# EAGLE board Final_board_R1_2 (EAGLE 7.2.0)
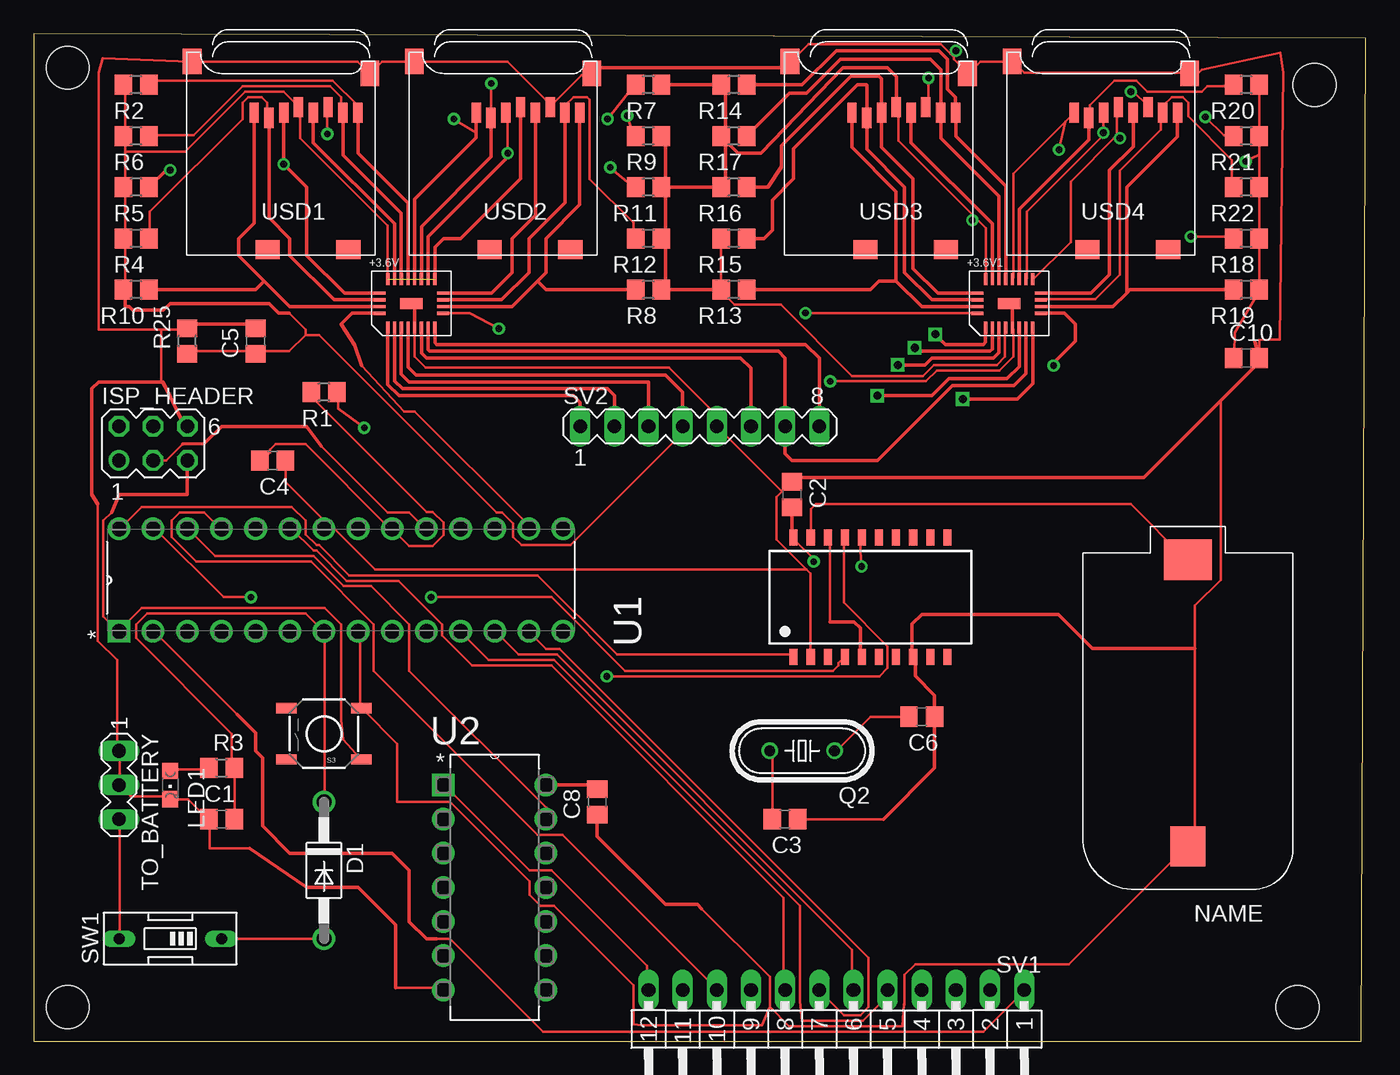
[diagram p0: board, top side]
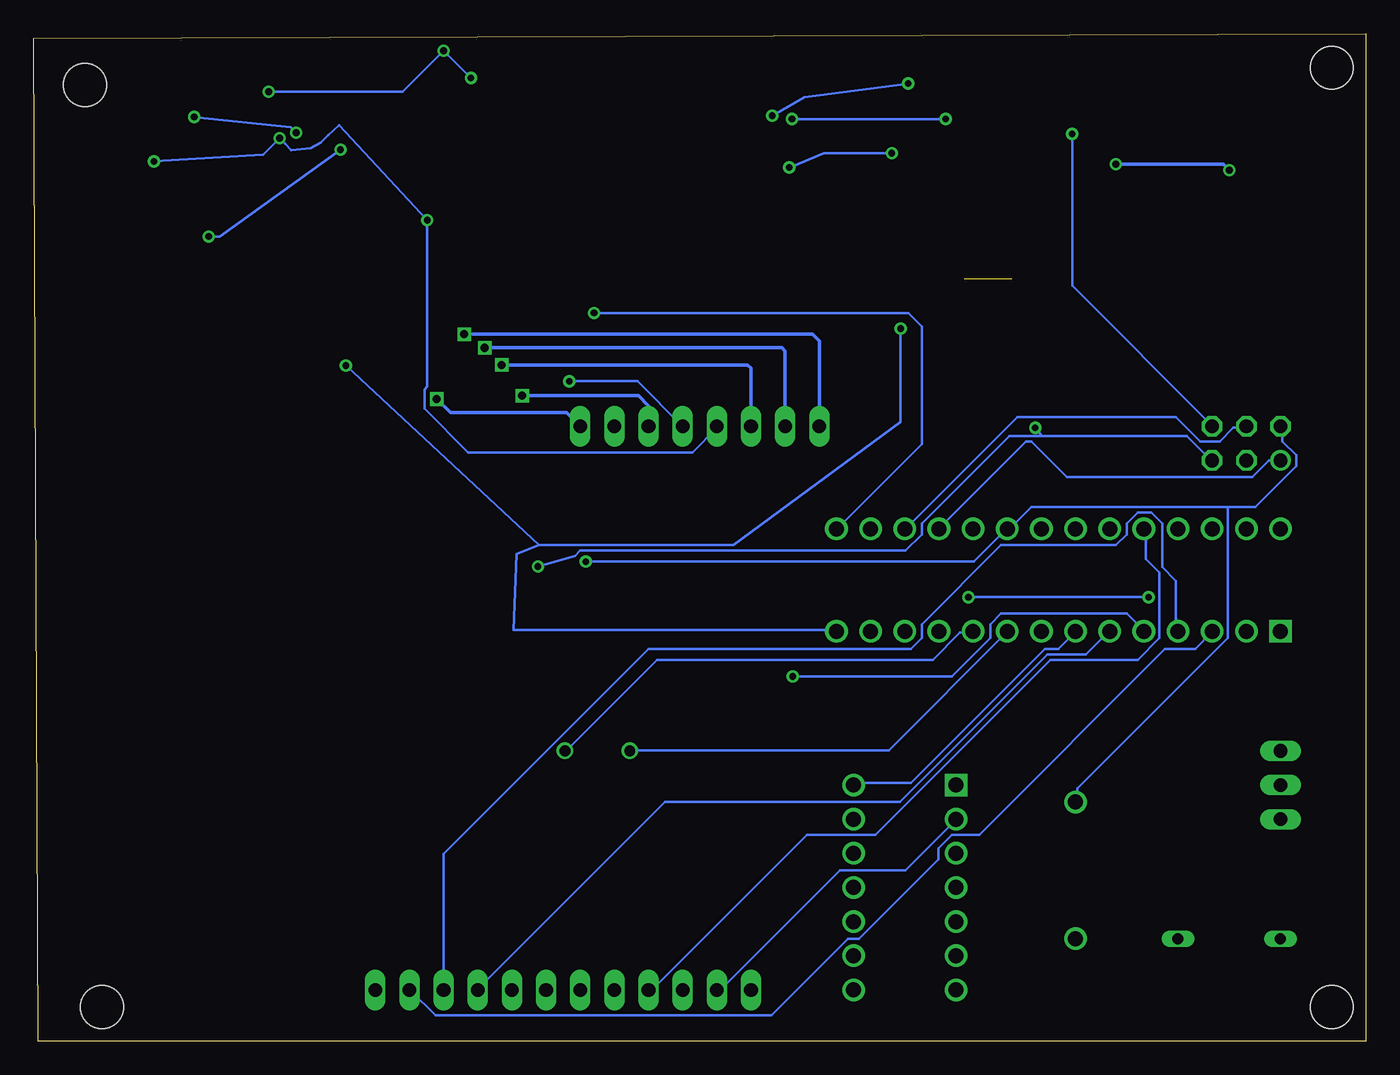
[diagram p1: board, bottom side, seen from below]

Size 99.07 x 74.93 mm. Coordinates in mm from the lower left corner, seen from the top.
Outline: 0,0 98.73,0 99.07,74.6 0.01,74.93 0,0
Copper layers (1*16): Top 0.0178mm / dielectric 59mil / Bottom 0.0178mm
Design rules "epl-lpkf *": minimum track width 8mil, minimum drill 0.5mm, track to track 8mil, track to pad 8mil, pad to pad 8mil, via to via 8mil, smd to smd 8mil, copper to edge 15mil, drill to drill 15mil, minimum pad ring 8mil, minimum via ring 8mil, stop-mask expansion 3mil, vias tented up to drill 0mil, thermal gap 10mil
Holes 3.2 mm at 2.54,72.39 2.54,2.54 93.98,2.54 95.25,71.12

## Footprints (pad centres in the part's own frame; a part is rotated, then mirrored left to right if it is on the bottom)
MLP-24 = smd 0.24 x 0.9: 1CLK -1.1,0.8; 1DAT[0] -0.6,0.8; 1DAT[1] -0.1,0.8; 2CMD 1.4,0.8; 2DAT[2] 0.4,0.8; 2DAT[3] 0.9,0.8; CLK 0.9,-2.8; CMD -0.6,-2.8; DAT[0] 1.4,-2.8; DAT[1] 1.9,-2.8; DAT[2] -1.6,-2.8; DAT[3] -1.1,-2.8; GND0 0.4,-2.8; VDDC1 -1.6,0.8; VDDC2 1.9,0.8; VDDH -0.1,-2.8 | smd 0.9 x 0.24: 1CMD -2.2,-0.25; 1DAT[2] -2.2,-1.25; 1DAT[3] -2.2,-0.75; 2CLCK 2.5,-0.25; 2DAT[0] 2.5,-0.75; 2DAT[1] 2.5,-1.25; /OE -2.2,-1.75; S 2.5,-1.75 | smd 1.676 x 0.813: GND1 0.138,-1.02
C0805 = smd 1.3 x 1.5: 1 -0.95,0; 2 0.95,0
DO41-10 = drill 1.118: A 5.08,0; C -5.08,0
MA03-2 = drill 1.016: 1 -2.54,-1.27 | drill 1.016 octagon: 2 -2.54,1.27; 3 0,-1.27; 4 0,1.27; 5 2.54,-1.27; 6 2.54,1.27
CHIPLED_0805 = smd 1.2 x 1.2: A 0,-1.05; C 0,1.05
HC49/S = drill 0.813: 1 -2.413,0; 2 2.413,0
R0805 = smd 1.3 x 1.5: 1 -0.95,0; 2 0.95,0
TACTILE-SWITCH-SMD = smd 1.524 x 0.762: 1 -2.794,1.905; 2 2.794,1.905; 3 -2.794,-1.905; 4 2.794,-1.905
MA12-1W = drill 1.016 long: 1 -13.97,0; 2 -11.43,0; 3 -8.89,0; 4 -6.35,0; 5 -3.81,0; 6 -1.27,0; 7 1.27,0; 8 3.81,0; 9 6.35,0; 10 8.89,0; 11 11.43,0; 12 13.97,0
MA08-1 = drill 1.016 long: 1 -8.89,0; 2 -6.35,0; 3 -3.81,0; 4 -1.27,0; 5 1.27,0; 6 3.81,0; 7 6.35,0; 8 8.89,0
EDG-01 = drill 0.813 long: 1 0,-3.81; 2 0,3.81
MA03-1 = drill 1.016 long: 1 -2.54,0; 2 0,0; 3 2.54,0
DIP254P762X457-28 = drill 1.118 square: 1 -7.62,33.02 | drill 1.118: 2 -7.62,30.48; 3 -7.62,27.94; 4 -7.62,25.4; 5 -7.62,22.86; 6 -7.62,20.32; 7 -7.62,17.78; 8 -7.62,15.24; 9 -7.62,12.7; 10 -7.62,10.16; 11 -7.62,7.62; 12 -7.62,5.08; 13 -7.62,2.54; 14 -7.62,0; 15 0,0; 16 0,2.54; 17 0,5.08; 18 0,7.62; 19 0,10.16; 20 0,12.7; 21 0,15.24; 22 0,17.78; 23 0,20.32; 24 0,22.86; 25 0,25.4; 26 0,27.94; 27 0,30.48; 28 0,33.02
DIP254P762X508-14 = drill 1.118 square: 1 -7.62,15.24 | drill 1.118: 2 -7.62,12.7; 3 -7.62,10.16; 4 -7.62,7.62; 5 -7.62,5.08; 6 -7.62,2.54; 7 -7.62,0; 8 0,0; 9 0,2.54; 10 0,5.08; 11 0,7.62; 12 0,10.16; 13 0,12.7; 14 0,15.24
N5 = smd 0.6 x 1.2: !INT -0.635,4.445; !PFO 3.175,4.445; !RST 0.635,4.445; !TS 1.905,-4.445; BBS -1.905,4.445; CLKOUT 3.175,-4.445; IFS 0.635,-4.445; N.C.1 5.715,-4.445; N.C.2 6.985,-4.445; N.C.3 5.715,4.445; N.C.4 6.985,4.445; PFI 1.905,4.445; SCL -4.445,-4.445; SDA/!CE -0.635,-4.445; SDI -3.175,-4.445; SDO -1.905,-4.445; TEST 4.445,4.445; VBAT -3.175,4.445; VDD -4.445,4.445; VSS 4.445,-4.445
S8421R = smd 2.6 x 3: GND 1.8,19.8 | smd 3.6 x 3: VBAT 1.8,-1.5
MICROSD = smd 0.7 x 1.5: 1 9,-10.64; 2 7.9,-10.24; 3 6.8,-10.64; 4 5.7,-11.04; 5 4.6,-10.64; 6 3.5,-11.04; 7 2.4,-10.64; 8 1.3,-10.64 | smd 1.8 x 1.4: CD1 2,-0.44; CD2 8,-0.44 | smd 1.4 x 1.9: MT1 0.4,-13.54; MT2 13.6,-14.44

## Placement (x,y rotation side)
+3.6V  [MLP-24]  27.94,55.88 0 top
+3.6V1  [MLP-24]  72.39,55.88 0 top
C1  10u  [C0805]  13.97,16.51 0 top
C2  10u  [C0805]  56.39,40.64 270 top
C3  22p  [C0805]  55.88,16.51 180 top
C4  10u  [C0805]  17.78,43.18 180 top
C5  200nF  [C0805]  16.51,52.07 90 top
C6  22p  [C0805]  66.04,24.13 180 top
C8  100n  [C0805]  41.91,17.78 90 top
C10  200nF  [C0805]  90.17,50.8 0 top
D1  1N4004  [DO41-10]  21.59,12.7 270 top
ISP_HEADER  [MA03-2]  8.89,44.45 0 top
LED1  [CHIPLED_0805]  10.16,19.05 180 top
Q2  16MHz  [HC49/S]  57.15,21.59 180 top
R1  10k  [R0805]  21.59,48.26 180 top
R2  47k  [R0805]  7.62,71.12 180 top
R3  10k  [R0805]  13.97,20.32 0 top
R4  47k  [R0805]  7.62,59.69 180 top
R5  47k  [R0805]  7.62,63.5 180 top
R6  47k  [R0805]  7.62,67.31 180 top
R7  47k  [R0805]  45.72,71.12 180 top
R8  47k  [R0805]  45.72,55.88 180 top
R9  47k  [R0805]  45.72,67.31 180 top
R10  47k  [R0805]  7.62,55.88 180 top
R11  47k  [R0805]  45.72,63.5 180 top
R12  47k  [R0805]  45.72,59.69 180 top
R13  47k  [R0805]  52.07,55.88 180 top
R14  47k  [R0805]  52.07,71.12 180 top
R15  47k  [R0805]  52.07,59.69 180 top
R16  47k  [R0805]  52.07,63.5 180 top
R17  47k  [R0805]  52.07,67.31 180 top
R18  47k  [R0805]  90.17,59.69 180 top
R19  47k  [R0805]  90.17,55.88 180 top
R20  47k  [R0805]  90.17,71.12 180 top
R21  47k  [R0805]  90.17,67.31 180 top
R22  47k  [R0805]  90.17,63.5 180 top
R25  750k  [R0805]  11.43,52.07 90 top
S3  TAC_SWITCHSMD  [TACTILE-SWITCH-SMD]  21.59,22.86 180 top
SV1  [MA12-1W]  59.69,3.81 180 top
SV2  [MA08-1]  49.53,45.72 0 top
SW1  [EDG-01]  10.16,7.62 90 top
TO_BATTERY  [MA03-1]  6.35,19.05 270 top
U1  ATMEGA328P-PU  [DIP254P762X457-28]  39.37,38.1 90 top
U2  CD4066BE  [DIP254P762X508-14]  38.1,3.81 0 top
U$1  RTC  [N5]  60.96,33.02 0 top
U$2  CR2032  [S8421R]  87.63,34.29 180 top
USD1  MICROSD  [MICROSD]  25.4,58.42 180 top
USD2  MICROSD  [MICROSD]  41.91,58.42 180 top
USD3  MICROSD  [MICROSD]  69.85,58.42 180 top
USD4  MICROSD  [MICROSD]  86.36,58.42 180 top

## Library data of the parts
+3.6V +3.6V1 = FSSD06_MLP24a
C1-C6 C8 C10 R1-R22 R25 = rcl
D1 = diode
ISP_HEADER SV1 SV2 TO_BATTERY = con-lstb; OC_FARNELL: unknown; OC_NEWARK: unknown
LED1 = led
Q2 = crystal; OC_FARNELL: 1667008; OC_NEWARK: unknown
S3 = SparkFun-Electromechanical; PROD_ID: SWCH-08247
SW1 = special
U1 = Atmel_By_element14_Batch_1-00; MPN: ATMEGA328P-PU; OC_FARNELL: 1715487; OC_NEWARK: 15R0268; PACKAGE: PDIP-28; SUPPLIER: Atmel
U2 = Texas Instruments_By_element14_Batch_1; MPN: CD4066BE; OC_FARNELL: 1106112; OC_NEWARK: 60K5124; PACKAGE: PDIP-14; SUPPLIER: Texas Instruments
U$1 = soic20
U$2 = CR2032
USD1-USD4 = adafruit

## Nets
/OE1: +3.6V1./OE U1.15
/OE2: +3.6V./OE U1.16
CLK: +3.6V1.CLK +3.6V.CLK SV2.6
CMD: +3.6V1.CMD +3.6V.CMD SV2.3
DAT[0]: +3.6V1.DAT[0] +3.6V.DAT[0] SV2.7
DAT[1]: +3.6V1.DAT[1] +3.6V.DAT[1] SV2.8
DAT[2]: +3.6V1.DAT[2] +3.6V.DAT[2] SV2.1
DAT[3]: +3.6V1.DAT[3] +3.6V.DAT[3] SV2.2
GND: +3.6V1.GND0 +3.6V1.GND1 +3.6V.GND0 +3.6V.GND1 C1.1 C2.1 C3.1 C4.1 C5.2 C6.1 C8.1 C10.2 ISP_HEADER.6 LED1.C R25.2 S3.3 SV2.5 TO_BATTERY.1 TO_BATTERY.2 U1.8 U1.22 U2.7 U$1.SDI U$1.VSS U$2.GND USD1.6 USD1.MT1 USD1.MT2 USD2.6 USD2.MT1 USD2.MT2 USD3.6 USD3.MT1 USD3.MT2 USD4.6 USD4.MT1 USD4.MT2
N$1: +3.6V.1DAT[0] R6.1 USD1.7
N$2: LED1.A R3.1
N$3: D1.A SW1.1
N$4: U1.27 U$1.SDA/!CE
N$5: ISP_HEADER.5 R1.1 S3.1 U1.1 U$1.!RST
N$6: SV1.1 U1.2
N$7: SV1.2 U1.3
N$8: C3.2 Q2.2 U1.9
N$10: C6.2 Q2.1 U1.10
N$11: ISP_HEADER.3 U1.19
N$12: SV1.3 U1.4
N$13: SV1.4 U1.6
N$14: U1.28 U$1.SCL
N$15: U$1.VBAT U$2.VBAT
N$16: SV1.5 U1.11
N$17: SV1.6 U1.12
N$18: SV1.7 U1.13
N$19: SV1.8 U1.23
N$20: SW1.2 TO_BATTERY.3
N$21: U$1.BBS U$1.IFS
N$22: SV1.9 U1.24
N$23: SV1.10 U1.25
N$24: U1.26 U2.13
N$25: U1.5 U$1.!INT
N$26: SV1.11 U2.2
N$27: SV1.12 U2.1
N$28: +3.6V.1DAT[1] R2.1 USD1.8
N$29: +3.6V.1DAT[2] R10.1 USD1.1
N$30: +3.6V.1CMD R5.1 USD1.3
N$31: +3.6V.1CLK USD1.5
N$32: +3.6V.2DAT[3] R9.2 USD2.2
N$33: +3.6V.2DAT[0] R12.2 USD2.7
N$34: +3.6V.2DAT[1] R8.2 USD2.8
N$35: +3.6V.2DAT[2] R7.2 USD2.1
N$36: +3.6V.2CMD R11.2 USD2.3
N$37: +3.6V.2CLCK USD2.5
N$38: +3.6V.1DAT[3] R4.1 USD1.2
N$39: +3.6V1.1DAT[0] R17.1 USD3.7
N$40: +3.6V1.1DAT[1] R14.1 USD3.8
N$41: +3.6V1.1DAT[2] R13.1 USD3.1
N$42: +3.6V1.1CMD R16.1 USD3.3
N$43: +3.6V1.1CLK USD3.5
N$44: +3.6V1.2DAT[3] R20.2 USD4.2
N$45: +3.6V1.2DAT[0] R22.2 USD4.7
N$46: +3.6V1.2DAT[1] R19.2 USD4.8
N$47: +3.6V1.2DAT[2] R18.2 USD4.1
N$48: +3.6V1.2CMD R21.2 USD4.3
N$49: +3.6V1.2CLCK USD4.5
N$50: +3.6V1.1DAT[3] R15.1 USD3.2
N$60: ISP_HEADER.1 U1.18
N$61: ISP_HEADER.4 U1.17
S: +3.6V1.S +3.6V.S U1.14
VCC: C1.2 C2.2 C4.2 C8.2 D1.C ISP_HEADER.2 R1.2 R3.2 U1.7 U1.20 U2.14 U$1.VDD
VDDH: +3.6V1.VDDC1 +3.6V1.VDDC2 +3.6V1.VDDH +3.6V.VDDC1 +3.6V.VDDC2 +3.6V.VDDH C5.1 C10.1 R2.2 R4.2 R5.2 R6.2 R7.1 R8.1 R9.1 R10.2 R11.1 R12.1 R13.2 R14.2 R15.2 R16.2 R17.2 R18.1 R19.1 R20.1 R21.1 R22.1 R25.1 SV2.4 USD1.4 USD2.4 USD3.4 USD4.4

## Tracks (layer width: path | path; a pad name or v marks a point on that pad's centre or on a via)
/OE1  (via drill 0.5)
  Top 0.203: v57.4,54.15 70,54.15 +3.6V1./OE
  Bottom 0.203: v57.4,54.15 34.04,54.15 33.02,53.14 33.02,44.4 39.32,38.1 U1.15
/OE2
  Top 0.203: 24.38,50.24 27.53,46.84 28.35,46.84 36.68,38.51 36.68,38.1 U1.16 | 25.91,54.15 +3.6V./OE
  Top 0.254: 25.91,54.15 23.67,54.15 22.86,53.34 23.88,51.77 24.38,50.24
CLK  (via drill 0.6 pad 0.25)
  Top 0.254: +3.6V.CLK 28.84,51.17 29.21,50.8 52.58,50.8 53.34,50.04 SV2.6 | +3.6V1.CLK 73.29,50.18 72.39,49.28 68.07,49.28 66.8,48.01 v62.74,48.01
  Bottom 0.254: v62.74,48.01 54.1,48.01 53.34,47.24 SV2.6
CMD  (via drill 0.6 pad 0.25)
  Top 0.254: +3.6V.CMD 27.34,49.62 27.94,49.02 45.72,49.02 SV2.3 | +3.6V1.CMD 71.79,51.22 71.37,50.8 66.8,50.8 66.29,50.29 v64.26,50.29
  Bottom 0.254: v64.26,50.29 45.97,50.29 45.72,50.04 SV2.3
DAT[0]
  Top 0.254: +3.6V.DAT[0] 29.34,51.43 29.46,51.31 55.37,51.31 55.88,50.8 SV2.7 55.88,43.69 56.39,43.18 62.74,43.18 68.33,48.77 72.9,48.77 73.79,49.66 +3.6V1.DAT[0]
DAT[1]  (via drill 0.6 pad 0.25)
  Top 0.254: +3.6V.DAT[1] 29.84,51.95 29.97,51.82 57.4,51.82 58.42,50.8 SV2.8 | +3.6V1.DAT[1] 74.29,48.89 73.15,47.75 v69.09,47.75
  Bottom 0.254: v69.09,47.75 68.07,46.74 59.44,46.74 SV2.8
DAT[2]  (via drill 0.6 pad 0.25)
  Top 0.254: +3.6V.DAT[2] 26.34,48.84 27.18,48.01 40.13,48.01 40.64,47.5 SV2.1 | +3.6V1.DAT[2] 70.79,51.99 70.61,51.82 67.82,51.82 v67.06,52.58
  Bottom 0.254: v67.06,52.58 41.15,52.58 40.64,52.07 SV2.1
DAT[3]  (via drill 0.6 pad 0.25)
  Top 0.254: +3.6V.DAT[3] 26.84,49.11 27.43,48.51 42.67,48.51 43.18,48.01 SV2.2 | +3.6V1.DAT[3] 71.29,51.48 71.12,51.31 65.79,51.31 v65.53,51.56
  Bottom 0.254: v65.53,51.56 43.43,51.56 43.18,51.31 SV2.2
GND  (via drill 0.5)
  Top 0.203: 26.92,3.96 30.38,3.96 U2.7 | 16.05,14.33 13.11,14.33 13.11,16.36 C1.1 12.9,16.56 11.48,17.98 10.26,17.98 LED1.C 10.06,18.19 7.21,18.19 TO_BATTERY.2 6.4,19.2 6.4,21.44 TO_BATTERY.1 6.2,21.64 6.2,28.35 4.78,29.77 4.78,39.93 | USD2.MT1 41.35,71.83 40.74,71.83 38.51,69.6 USD2.6 38.3,69.6 38.3,69.8 35.26,72.85 28.35,72.85 USD2.MT2 28.14,72.85 25.91,72.85 25.09,72.03 USD1.MT1 24.89,72.03 24.08,72.85 11.89,72.85 USD1.MT2 11.68,72.85 5.13,73.1 4.83,72.03 4.83,52.93 9.5,52.93 | 11.48,45.82 ISP_HEADER.6 | 9.5,52.93 11.28,52.93 R25.2 | 9.5,52.93 9.5,49.12 11.28,45.82 ISP_HEADER.6 | 11.28,45.62 ISP_HEADER.6 | 65.53,28.55 U$1.VSS | U1.8 24.28,30.38 24.28,24.89 S3.3 24.49,24.69 27.03,22.1 27.03,17.78 30.99,17.78 36.88,11.89 36.88,10.87 37.69,10.06 38.71,10.06 44.6,4.17 44.6,1.27 45.21,1.17 54.15,1.17 54.76,2.54 | 49.68,9.86 54.76,4.77 54.76,2.54 | 54.76,2.54 56.19,1.12 64.62,1.12 64.72,2.74 64.77,2.7 64.77,4.92 65.56,5.72 76.99,5.72 85.73,14.45 U$2.GND 86.36,14.61 86.36,29.21 86.36,32.39 88.27,34.29 88.27,47.62 | 90.93,51.92 C10.2 91.14,52.12 91.9,52.17 92.66,52.17 92.91,72.03 92.71,73.51 86.87,72.24 86.46,71.83 USD4.MT1 85.85,72.03 73.66,72.03 72.85,72.85 USD4.MT2 72.64,72.85 70.41,72.85 69.6,72.03 USD3.MT1 69.37,72.07 68.42,73.02 68.42,73.18 68.16,73.44 | +3.6V.GND0 28.35,52.93 28.35,50.9 29.16,50.09 47.24,50.09 50.7,46.63 50.7,45.82 SV2.5 55.64,40.88 | 65.33,28.75 U$1.VSS | 21.59,38.73 18.73,41.59 C4.1 | U$1.SDI 57.78,34.77 57.47,35.08 | 57.47,35.08 55.24,37.31 55.24,40.48 55.64,40.88 | 55.64,40.88 56.36,41.59 C2.1 | U1.22 22.38,38.1 25.4,35.08 57.47,35.08
  Top 0.203: 68.16,73.44 67.47,74.14 57.63,74.14 56.36,72.87 USD3.MT2 | 65.56,28.57 U$1.VSS | 63.18,16.51 C3.1 | C6.1 | v59.23,49.07 66.34,49.07 67.16,49.89 71.83,49.89 72.85,50.9 72.85,52.93 +3.6V1.GND0 | v66.55,71.63 66.55,69.6 USD3.6 | v68.58,73.66 68.38,73.66 68.16,73.44 | v81.59,70.61 81.79,70.61 82.8,69.6 USD4.6 | v21.84,67.46 21.84,69.39 USD1.6
  Top 0.254: +3.6V.GND0 28.34,54.6 +3.6V.GND1 | +3.6V1.GND0 72.79,54.6 +3.6V1.GND1 | 90.81,52.07 C10.2 91.12,50.48 88.27,47.62 82.55,41.91 56.71,41.91 C2.1 | 86.36,71.75 USD4.MT1 | USD3.MT2 55.88,72.39 41.91,72.39 USD2.MT1 | R25.2 11.43,53.34 16.51,53.34 C5.2 16.51,52.71 | U1.22 21.59,38.73 | C8.1 41.91,15.24 46.99,10.16 49.38,10.16 49.68,9.86 | 65.56,28.57 65.56,27.15 66.99,25.72 C6.1 66.99,20.32 63.18,16.51 | 65.33,28.75 65.33,31.04 66.04,31.75 76.2,31.75 78.74,29.21 86.36,29.21 | 11.28,45.62 9.65,49.02 4.83,49.02 4.32,48.51 4.32,40.64 4.78,39.93 | 16.05,14.33 20.32,11.43 24.13,11.43 26.92,8.64 26.92,3.96
  Bottom 0.203: v59.23,49.07 54.15,49.07 SV2.5 | v66.55,71.63 v68.58,73.66 71.63,70.61 v81.59,70.61 | v21.84,67.46 21.84,56.19 11.48,45.82 ISP_HEADER.6
N$1
  Top 0.203: R6.1 8.64,67.36 11.89,67.36 15.55,71.02 22.05,71.02 22.86,70.21 22.86,69.19 USD1.7
  Top 0.254: USD1.7 23,65.9 27.34,61.56 +3.6V.1DAT[0]
N$2
  Top 0.203: LED1.A 10.26,20.22 12.9,20.22 R3.1
N$3
  Top 0.203: D1.A SW1.1
N$4  (via drill 0.5)
  Top 0.203: v29.57,33.02 38.51,33.02 43.99,27.53 59.44,27.53 59.84,27.94 59.84,28.14 60.25,28.55 U$1.SDA/!CE | v16.15,33.02 14.12,33.02 9.04,38.1 U1.27
  Bottom 0.203: v16.15,33.02 v29.57,33.02
N$5  (via drill 0.5)
  Top 0.203: 5.79,39.32 5.18,38.71 5.18,31.6 6.2,30.58 U1.1 6.4,30.58 8.03,32.21 21.64,32.21 22.86,30.99 22.86,23.88 23.01,22.45 24.28,21.03 S3.1 | v61.57,35.31 61.47,36.47 61.47,37.29 U$1.!RST | v24.59,45.62 22.66,47.04 22.66,48.26 R1.1
  Top 0.254: ISP_HEADER.5 11.43,40.64 6.35,40.64 5.79,39.32
  Bottom 0.203: v61.57,35.31 58.83,36.07 58.42,36.47 34.24,36.47 33.02,37.69 33.02,38.51 26.52,45.01 24.08,45.01 | 24.08,45.01 13.31,45.01 11.48,43.18 ISP_HEADER.5 | 24.08,45.01 v24.59,45.62
N$6
  Top 0.203: 29.97,7.62 30.99,7.62 37.9,0.71 70.61,0.71 73.66,3.76 SV1.1 | 15.14,24.28 9.04,30.38 U1.2
  Top 0.254: 15.14,24.28 16.51,22.91 16.51,21.59 17.02,21.08 17.02,16 19.05,13.97 26.67,13.97 27.94,12.7 27.94,8.89 29.21,7.62 29.97,7.62
N$7
  Bottom 0.203: SV1.2 71.02,3.76 69.19,1.93 44.2,1.93 38.51,7.62 37.69,7.62 31.8,13.51 31.8,14.33 30.79,15.34 28.75,15.34 14.93,29.16 12.7,29.16 11.48,30.38 U1.3
N$8
  Top 0.203: C3.2 54.93,21.43 54.77,21.59 Q2.2
  Bottom 0.203: U1.9 26.72,30.38 35.46,21.64 54.56,21.64 Q2.2
N$10
  Top 0.203: 59.64,21.64 Q2.1 59.69,21.59 62.23,24.13 C6.2
  Bottom 0.203: U1.10 29.36,30.38 30.18,30.38 32.21,28.35 52.73,28.35 59.44,21.64 Q2.1
N$11
  Top 0.203: ISP_HEADER.3 9.86,43.18 11.07,44.4 | 21.23,44.4 21.39,44.25 26.31,39.32 27.94,39.32 29.16,38.1 U1.19
  Top 0.254: 11.07,44.4 12.7,44.45 13.97,45.72 20.32,45.72 21.39,44.25
N$12
  Bottom 0.203: SV1.3 68.58,13.92 53.34,29.16 33.83,29.16 33.02,29.97 33.02,30.99 27.13,36.88 18.59,36.88 17.78,37.69 17.78,38.51 16.97,39.32 15.95,39.32 15.14,38.51 15.14,35.26 14.12,34.24 14.12,30.58 U1.4
N$13
  Bottom 0.203: SV1.4 65.94,3.96 52.12,17.78 34.65,17.78 23.67,28.75 20.83,28.75 19.2,30.38 U1.6
N$14
  Top 0.203: U$1.SCL 56.39,28.75 43.38,28.75 37.49,34.65 23.47,34.65 21.23,36.88 21.03,36.88 20.22,37.69 20.22,38.71 19.2,39.73 8.03,39.73 6.4,38.1 U1.28
N$15
  Top 0.203: U$1.VBAT 57.81,37.49 57.81,39.57 58.17,39.93 81.59,39.93 85.65,35.87 U$2.VBAT
N$16
  Top 0.203: SV1.5 63.5,3.35 61.67,1.52 57.15,1.52 57,2.95 57,10.06 38.71,28.35 33.83,28.35 31.8,30.38 U1.11
N$17
  Top 0.203: SV1.6 60.86,3.96 60.86,6.81 38.91,28.75 36.07,28.75 34.44,30.38 U1.12
N$18
  Top 0.203: SV1.7 58.42,3.76 60.25,1.93 61.47,1.93 62.08,2.54 62.08,6.2 39.12,29.16 38.1,29.16 36.88,30.38 U1.13
N$19
  Top 0.203: SV1.8 55.78,3.96 55.78,10.67 38.51,27.94 32.61,27.94 30.38,30.18 30.38,30.99 27.13,34.24 23.27,34.24 21.03,36.47 20.83,36.47 19.2,38.1 U1.23
N$20
  Top 0.203: SW1.2 6.4,7.62 6.4,16.36 TO_BATTERY.3
N$21
  Top 0.203: 59.23,31.19 59.23,37.29 U$1.BBS | 61.67,28.75 U$1.IFS
  Top 0.254: 59.23,31.19 61.01,31.19 61.47,30.73 61.47,28.7 U$1.IFS
N$22
  Bottom 0.203: SV1.9 53.34,3.96 52.93,3.96 41.55,15.34 36.47,15.34 23.47,28.35 16.97,28.35 15.34,29.97 15.34,34.85 16.36,35.87 16.36,38.1 U1.24
N$23
  Top 0.203: SV1.10 50.7,3.96 39.32,15.34 37.49,15.34 25.3,27.53 25.3,30.99 20.62,35.66 12.09,35.66 10.26,37.49 10.26,38.71 10.87,39.32 12.7,39.32 13.92,38.1 U1.25
N$24
  Top 0.203: U2.13 38.1,17.37 27.94,27.53 27.94,30.99 25.09,33.83 23.06,33.83 20.83,36.07 13.51,36.07 11.48,38.1 U1.26
N$25  (via drill 0.5)
  Top 0.203: v42.62,27.13 62.89,27.13 63.5,27.74 63.5,29.36 60.25,32.61 60.25,37.29 U$1.!INT
  Bottom 0.203: v42.62,27.13 30.79,27.13 27.94,29.97 27.94,30.99 27.13,31.8 17.78,31.8 16.56,30.58 U1.5
N$26
  Bottom 0.203: SV1.11 48.26,3.96 47.85,3.96 39.12,12.7 34.24,12.7 30.58,16.36 U2.2
N$27
  Top 0.203: SV1.12 45.62,3.96 45.62,5.59 38.51,12.7 36.88,12.7 30.58,19 U2.1
N$28
  Top 0.203: USD1.8 24.08,69.19 24.08,69.6 22.25,71.42 8.84,71.42 8.64,71.22 R2.1
  Top 0.254: +3.6V.1DAT[1] 27.84,62.33 24.13,66.04 24.13,69.03 USD1.8
N$29
  Top 0.254: USD1.1 16.4,60.85 15.24,59.69 15.24,58.42 17.14,56.52 | 17.14,56.52 19.03,54.63 +3.6V.1DAT[2] | R10.1 16.51,55.88 17.14,56.52
N$30  (via drill 0.5)
  Top 0.254: +3.6V.1CMD 23.11,55.63 20.32,58.42 20.32,63.5 19.05,64.77 v18.6,65.22 USD1.3 | R5.1 9.84,64.77 v10.16,64.77
  Bottom 0.254: v10.16,64.77 10.61,65.22 v18.6,65.22
N$31
  Top 0.254: USD1.5 20.8,66.83 26.84,60.79 +3.6V.1CLK
N$32  (via drill 0.5)
  Top 0.203: v34.04,71.22 34.04,68.78 USD2.2 | v44.14,68.83 44.6,67.36 R9.2
  Top 0.254: +3.6V.2DAT[3] 28.84,60.59 34.01,65.76 USD2.2
  Bottom 0.203: v34.04,71.22 41.76,70.21 v44.14,68.83
N$33
  Top 0.203: R12.2 44.6,59.84 44.6,60.86 41.35,64.11 41.35,70 41.15,70.21 40.13,70.21 39.52,69.6 39.52,69.19 USD2.7
  Top 0.254: USD2.7 39.51,62.37 36.83,59.69 36.83,57.15 34.81,55.13 +3.6V.2DAT[0]
N$34
  Top 0.254: USD2.8 40.61,62.2 38.1,59.69 38.1,57.15 37.46,56.52 | 37.46,56.52 35.58,54.63 +3.6V.2DAT[1] | R8.2 38.1,55.88 37.46,56.52
N$35  (via drill 0.5)
  Top 0.203: v42.67,68.58 44.6,71.02 R7.2 | v31.24,68.58 32.91,67.56
  Top 0.254: +3.6V.2DAT[2] 28.34,62.63 32.91,67.2 32.91,67.56 USD2.1
  Bottom 0.203: v31.24,68.58 v42.67,68.58
N$36  (via drill 0.5)
  Top 0.203: v35.26,66.04 35.26,68.99 USD2.3 | v42.88,64.97 44.6,63.5 R11.2
  Top 0.254: +3.6V.2CMD 29.34,59.82 35.26,65.73 v35.26,66.04
  Bottom 0.203: v35.26,66.04 40.28,66.04 v42.88,64.97
N$37
  Top 0.254: USD2.5 37.31,61.44 35.56,59.69 35.56,57.15 34.04,55.63 +3.6V.2CLCK
N$38
  Top 0.203: R4.1 8.64,59.84 8.64,61.67 15.55,68.58 15.55,69.8 15.95,70.21 16.97,70.21 17.37,69.8 17.37,68.78 USD1.2
  Top 0.254: USD1.2 17.5,61.24 19.05,59.69 19.05,58.42 22.34,55.13 +3.6V.1DAT[3]
N$39
  Top 0.254: +3.6V1.1DAT[0] 71.79,62.83 67.45,67.17 USD3.7 67.45,72.25 66.68,73.02 60.01,73.02 57.47,70.48 56.2,70.48 R17.1
N$40
  Top 0.254: +3.6V1.1DAT[1] 72.29,63.6 68.58,67.31 68.58,69.03 USD3.8 68.55,70.2 67.95,70.8 67.95,73.02 67.31,73.66 59.69,73.66 57.15,71.12 R14.1
N$41
  Top 0.254: +3.6V1.1DAT[2] 70.17,54.61 66.04,54.61 64.14,56.52 | 64.14,56.52 64.14,63.18 60.85,66.47 USD3.1 | R13.1 62.23,55.88 62.87,56.52 64.14,56.52
N$42
  Top 0.254: +3.6V1.1CMD 67.24,55.63 65.41,57.47 65.41,64.13 63.05,66.49 USD3.3 63.05,71.57 62.87,71.75 60.77,71.75 55.63,66.61 55.63,65.02 54.61,63.5 R16.1
N$43
  Top 0.254: +3.6V1.1CLK 71.29,60.79 65.25,66.83 USD3.5
N$44
  Top 0.203: R20.2 89.1,71.02 87.27,71.02 86.87,70.61 82.8,70.61 81.99,71.42 80.37,71.42 78.54,69.6 78.54,68.78 USD4.2
  Top 0.254: +3.6V1.2DAT[3] 73.29,61.86 78.46,67.03 USD4.2
N$45
  Top 0.203: +3.6V1.2DAT[0] 75.08,55.17 78.94,55.17 80.77,57 80.77,64.72 83.82,67.77 83.82,68.99 USD4.7 84.02,69.19 84.02,69.6 84.63,70.21 85.45,70.21 85.85,69.8 85.85,68.78 89.1,65.53 89.1,63.5 R22.2
N$46
  Top 0.254: +3.6V1.2DAT[1] 80.24,54.63 80.26,54.61 81.28,55.63 | 81.28,55.63 81.28,63.5 85.06,67.28 USD4.8 | 88.9,55.88 R19.2 81.53,55.88 81.28,55.63
N$47  (via drill 0.5)
  Top 0.203: 76.71,68.38 77.32,68.99 USD4.1 | 76.71,68.38 72.85,64.52 72.85,56.79 +3.6V1.2DAT[2] | v86.06,59.84 89.1,59.84 R18.2 | 76.71,68.38 v76.25,66.29
  Bottom 0.203: v86.06,59.84 85.24,59.84 v76.25,66.29
N$48  (via drill 0.5)
  Top 0.203: +3.6V1.2CMD 73.86,56.79 73.86,61.67 79.55,67.36 v79.55,67.56 79.55,68.99 USD4.3 | v87.12,68.73 88.49,67.36 89.1,67.36 R21.2
  Bottom 0.203: v87.12,68.73 79.96,67.97 v79.55,67.56
N$49
  Top 0.254: +3.6V1.2CLCK 78.62,55.63 80.01,57.02 80.01,64.77 81.76,66.52 USD4.5
N$50
  Top 0.254: +3.6V1.1DAT[3] 66.79,55.13 64.77,57.15 64.77,63.5 61.95,66.32 USD3.2 61.95,71.08 61.91,71.12 61.28,71.12 56.52,66.36 56.52,64.13 54.93,62.55 54.93,60.32 54.29,59.69 R15.1
N$60
  Bottom 0.203: ISP_HEADER.1 7.21,43.18 8.43,41.96 22.25,41.96 24.89,44.6 25.3,44.6 31.8,38.1 U1.18
  Bottom 0.254: U1.18 31.75,37.47
N$61
  Bottom 0.203: ISP_HEADER.4 9.04,45.62 9.86,45.62 10.87,44.6 12.29,44.6 14.12,46.43 25.91,46.43 34.24,38.1 U1.17
S  (via drill 0.5)
  Top 0.203: v34.59,52.98 32.41,54.15 30.58,54.15 +3.6V.S | 75.08,54.15 +3.6V1.S
  Top 0.254: 75.08,54.15 76.66,54.15 77.47,53.34 77.47,52.07 75.9,50.5 v75.84,50.24
  Bottom 0.203: v34.59,52.98 34.59,46.03 47.04,36.88 61.47,36.88 | 61.47,36.88 63.14,36.22 63.4,30.58 39.52,30.58 U1.14 | 61.47,36.88 v75.84,50.24
VCC  (via drill 0.5)
  Top 0.203: 56.59,37.49 U$1.VDD 56.59,37.29 58.01,35.87 v58.01,35.66 | C1.2 14.93,16.56 14.93,20.22 R3.2 14.73,20.42 14.73,22.86 7.62,29.97 7.62,30.99 8.43,31.8 20.22,31.8 21.44,30.58 U1.7 21.64,30.38 21.64,17.78 D1.C | R1.2 20.8,48.26 20.8,47.78 29.21,39.37 29.69,39.37 30.48,38.58 30.48,37.62 29.69,36.83 27.94,36.83 U1.20 26.52,38.1 20.22,44.4 17.98,44.4 17.58,43.99 17.58,43.79 16.97,43.18 C4.2
  Top 0.254: 56.59,37.49 56.39,37.69 C2.2 | U2.14 41.59,19.05 C8.2
  Bottom 0.203: U2.14 38.1,19.2 33.83,19.2 23.88,29.16 22.86,29.16 21.64,30.38 U1.7 | v58.01,35.66 29.16,35.66 26.72,38.1 U1.20 26.52,38.1 24.89,39.73 10.26,39.73 | 10.26,39.73 8.23,39.73 5.18,42.77 5.18,43.59 6.2,44.6 6.2,45.62 ISP_HEADER.2 | 10.26,39.73 10.26,29.97 21.44,18.8 21.44,17.78 D1.C
VDDH  (via drill 0.5)  (1 unrouted)
  Top 0.203: R25.1 11.48,51.31 16.36,51.31 C5.1 16.56,51.31 19,51.31 20.22,52.53 | 6.81,66.14 6.81,67.16 R6.2 6.81,67.36 6.81,71.02 R2.2 | 6.81,66.14 6.81,63.5 | 6.81,63.5 6.81,59.84 R4.2 6.81,59.64 6.81,55.98 R10.2 6.81,55.78 | 6.81,63.5 R5.2 | 20.22,52.53 20.22,52.93 19,54.15 | 6.81,66.14 11.28,66.14 15.75,70.61 18.59,70.61 19.61,69.6 USD1.4 19.81,69.39 19.81,67.16 26.31,60.66 26.31,56.79 +3.6V.VDDC1 | +3.6V1.VDDH 72.24,52.93 72.24,50.9 71.63,50.29 66.95,50.29 66.14,49.48 60.86,49.48 55.57,54.76 52.12,54.76 51.1,55.78 R13.2 51.1,55.98 51.1,59.64 R15.2 | C10.1 89.31,52.12 89.31,52.68 91.14,55.78 R19.1 91.14,55.98 91.14,59.64 R18.1 91.14,59.84 91.14,63.5 | 70,61.27 64.31,66.95 64.31,69.39 USD3.4 | 70,61.27 70.82,60.45 70.82,56.79 +3.6V1.VDDC1 | R20.1 91.14,71.02 91.14,67.36 R21.1 91.14,67.16 91.14,65.94 | 91.14,63.5 91.14,65.94 | 91.14,63.5 R22.1 | 80.57,67.36 77.11,63.91 77.11,59.44 74.27,56.59 +3.6V1.VDDC2 | 80.57,67.36 80.57,69.39 USD4.4 | v90.12,65.43 91.14,65.94 | 80.57,67.36 v80.77,67.16 | v69.8,61.06 70,61.27 | 20.22,52.53 21.23,52.53 34.44,39.32 34.85,39.32 35.66,38.51 35.66,37.49 36.27,36.88 39.93,36.88 48.26,45.21 SV2.4
  Top 0.254: USD3.4 64.15,71.74 63.5,72.39 60.2,72.39 54.1,66.04 52.39,66.04 R17.2 51.44,67.31 | SV2.4 48.26,48.26 46.99,49.53 28.45,49.53 27.84,50.14 +3.6V.VDDH | 46.99,59.69 46.99,55.88 | R13.2 46.99,55.88 | 46.99,55.88 R8.1 | 46.99,63.5 46.99,67.31 R9.1 | 51.44,67.31 51.44,63.5 R16.2 46.99,63.5 | R7.1 R14.2 51.44,71.12 51.44,67.31 | 46.99,63.5 46.99,59.69 | 46.99,59.69 R12.1 | 46.99,63.5 R11.1 | 6.81,55.78 6.81,54.66 6.86,54.61 7.11,54.61 7.37,54.36 9.65,54.36 10.16,54.86 17.53,54.86 18.24,54.15 19,54.15 | +3.6V.VDDC2 29.84,59.05 30.48,59.69 31.75,59.69 36.21,64.15 USD2.4
  Bottom 0.203: v90.12,65.43 81.99,65.94 v80.77,67.16 80.37,66.75 79.91,66.24 78.49,66.4 77.72,66.8 77.17,67.36 76.35,68.12 v69.8,61.06 69.8,48.67 70,48.46 70,47.04 66.75,43.79 50.09,43.79 48.26,45.62 SV2.4